# Altium PCB CoaxPress_SFP.PcbDoc
Units mm, origin at the board's own origin, x right, y up, seen from the top; angles counter-clockwise.
Board outline 58 x 11 mm, 4 copper layers (Top Layer, Mid-Layer 1, Mid-Layer 2, Bottom Layer); 27 components, 25 nets, 129 pads, 0 vias.
Unrouted connection lines stored in the file: 76.
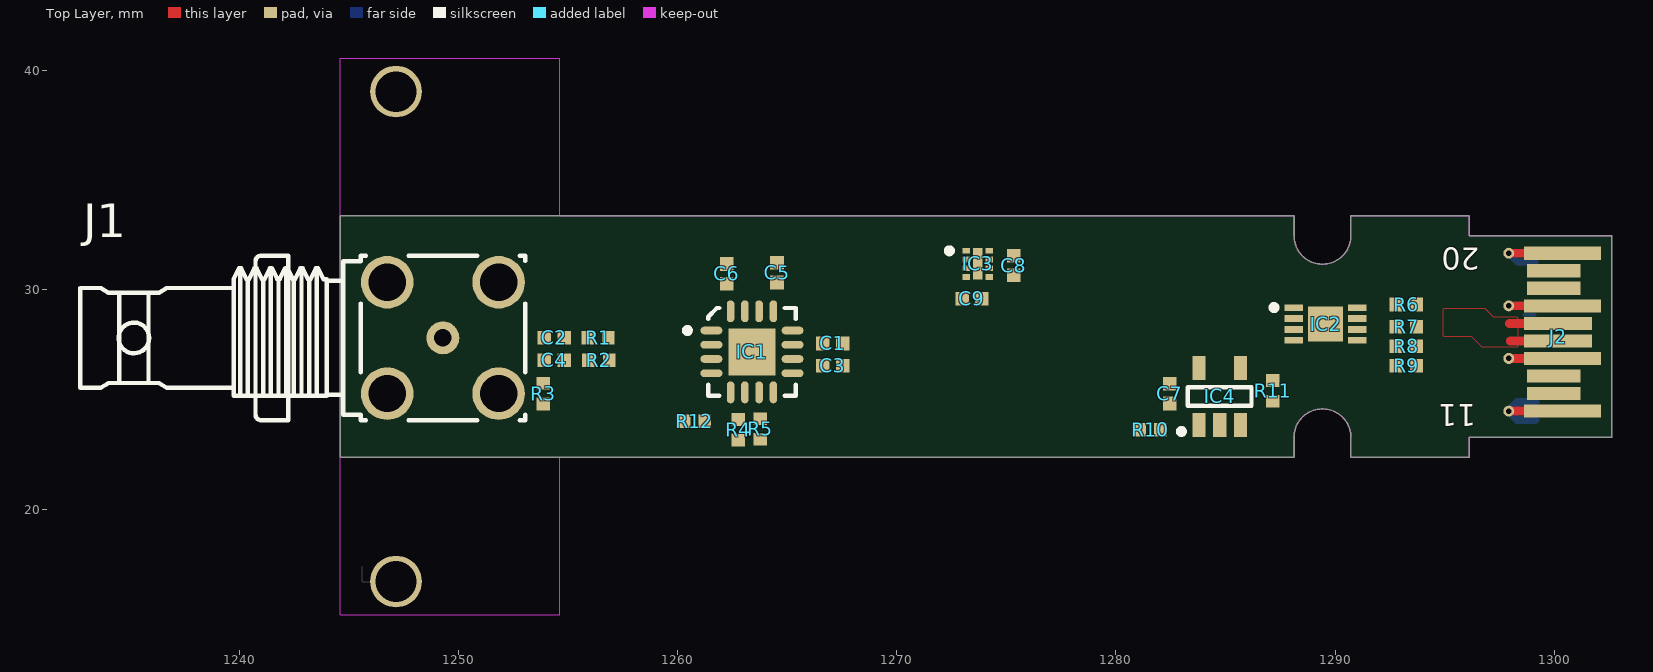
[diagram p0: Top Layer view]
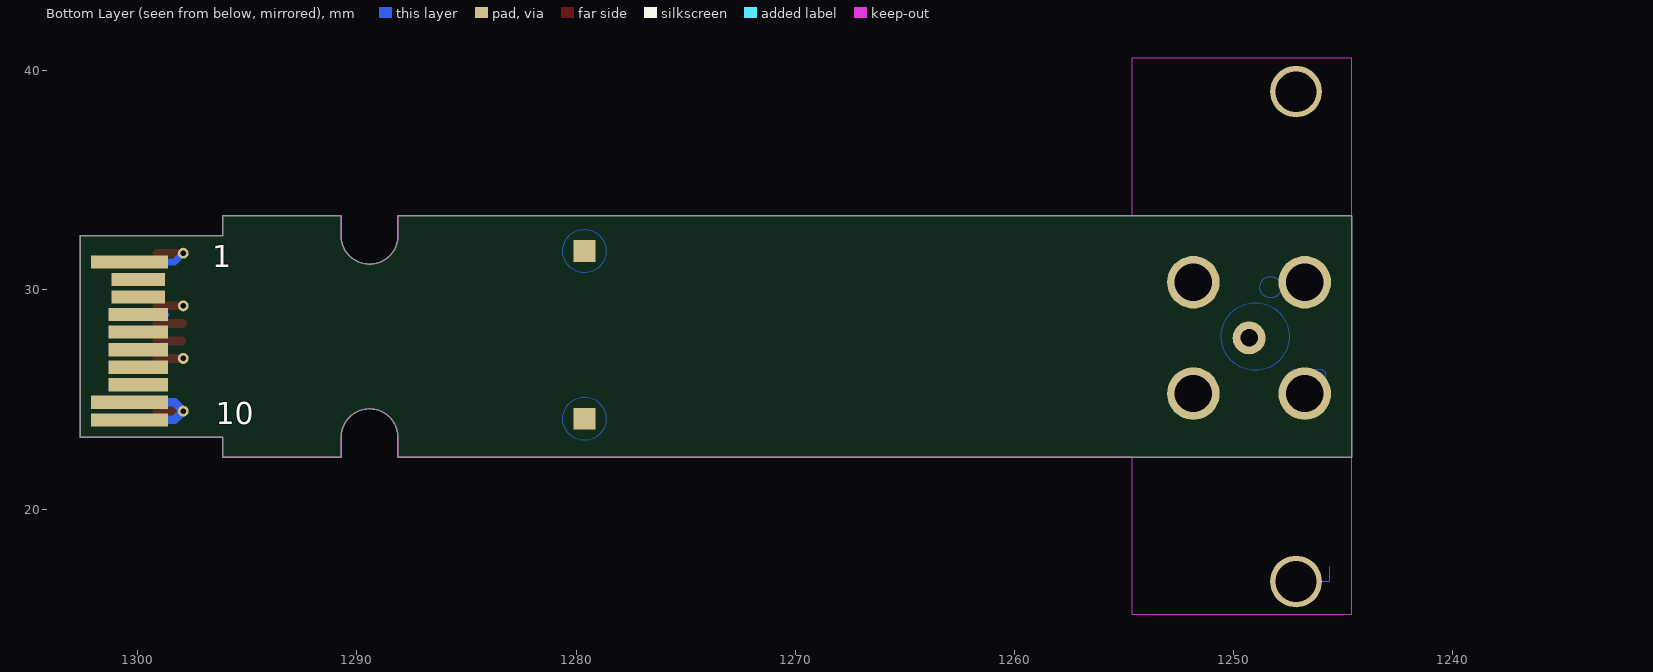
[diagram p1: Bottom Layer view, seen from below]
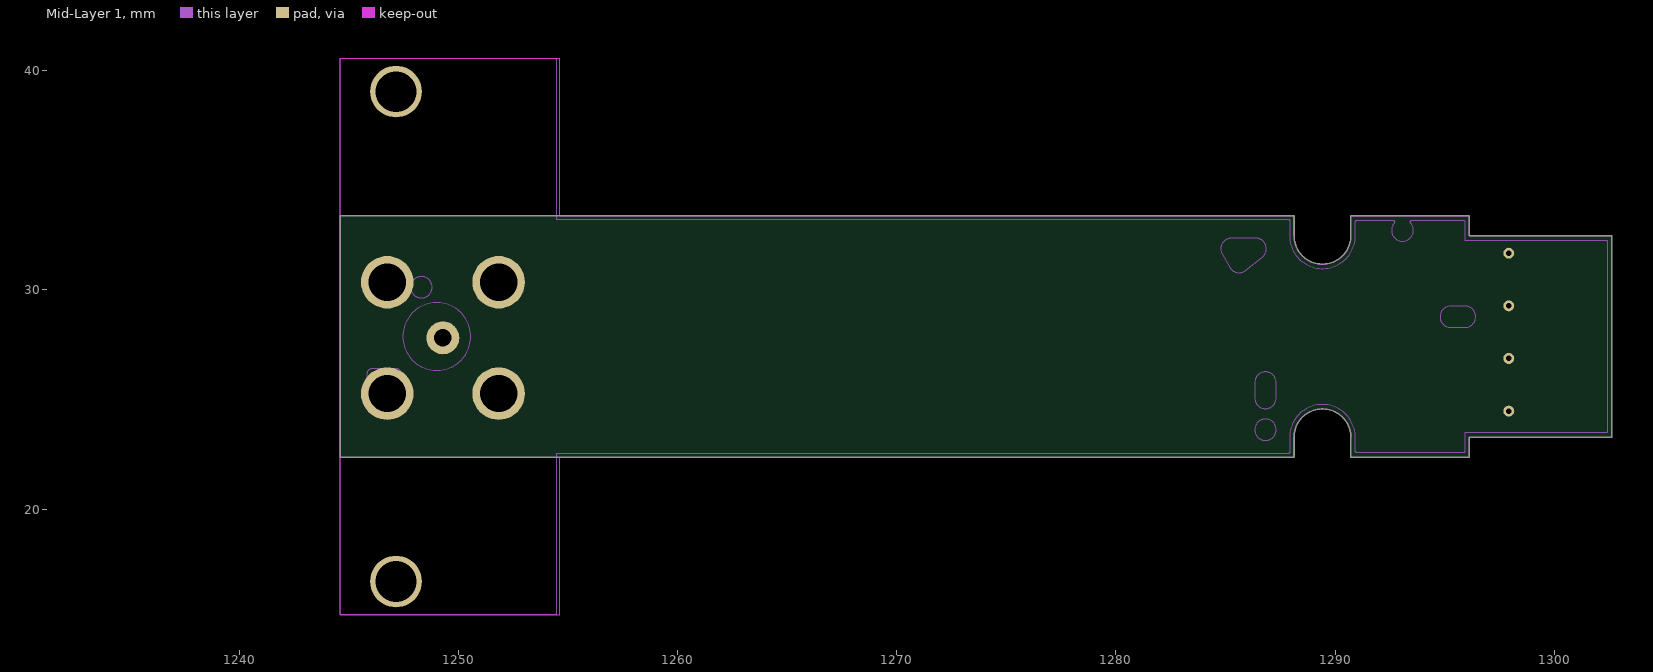
[diagram p2: Mid-Layer 1]
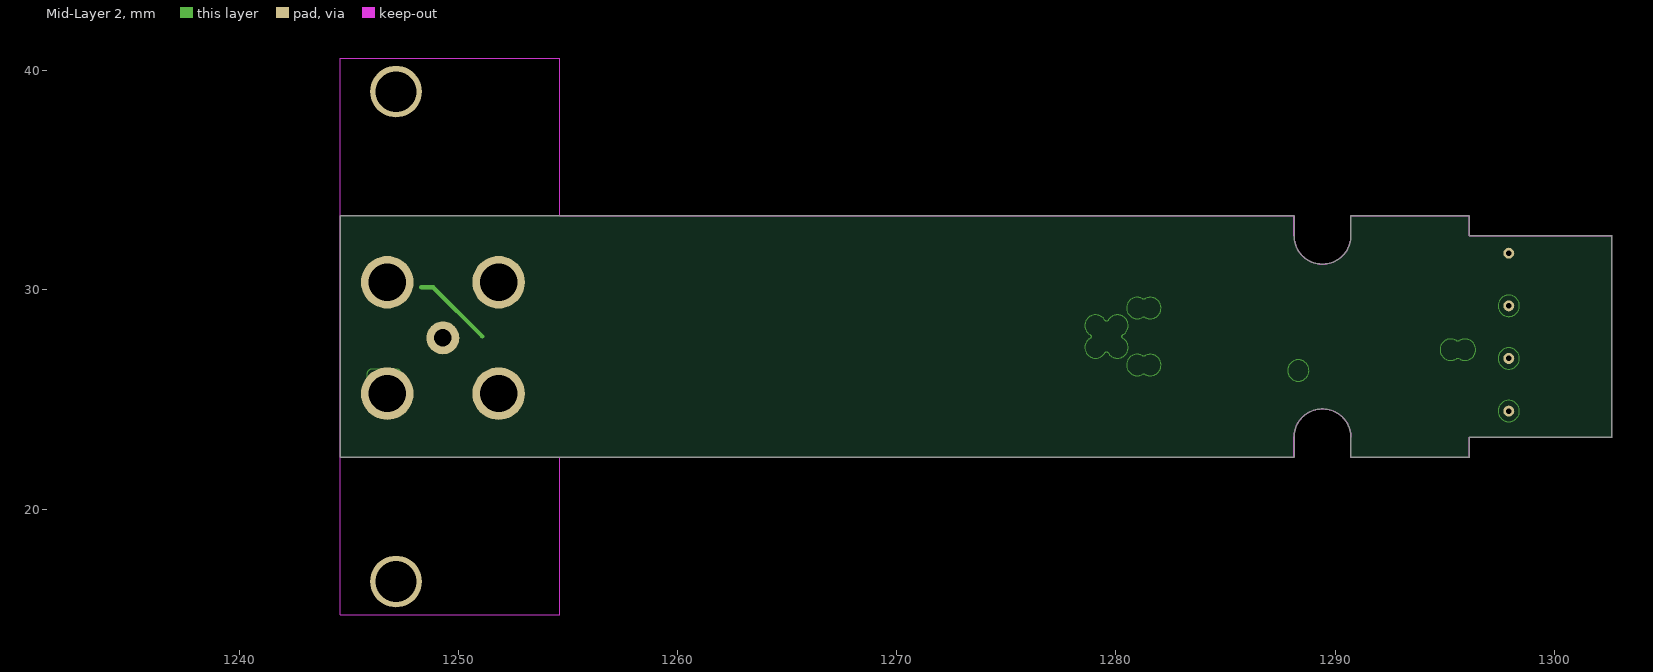
[diagram p3: Mid-Layer 2]

## Layer stack, top to bottom
Top Solder: solder mask 0.0102, Solder Resist, Dk 3.5
Top Layer: signal copper 0.0356
Dielectric 1: dielectric 0.32, FR-4, Dk 4.8
Mid-Layer 1: signal copper 0.0356
Dielectric 2: dielectric 0.32, FR-4, Dk 4.8
Mid-Layer 2: signal copper 0.0356
Dielectric 3: dielectric 0.32, FR-4, Dk 4.8
Bottom Layer: signal copper 0.0356
Bottom Solder: solder mask 0.0102, Solder Resist, Dk 3.5

## Board outline
1244.622,22.374 1288.118,22.374 1288.12,22.376 1288.12,23.276 1288.124,23.367 1288.133,23.457 1288.149,23.546 1288.171,23.634 1288.199,23.72 1288.233,23.804 1288.272,23.885 1288.318,23.964 1288.368,24.039 1288.424,24.11 1288.485,24.178 1288.55,24.241 1288.619,24.299 1288.692,24.352 1288.769,24.4 1288.849,24.443 1288.932,24.479 1289.017,24.51 1289.104,24.535 1289.193,24.554 1289.282,24.567 1289.373,24.573 1289.463,24.573 1289.554,24.567 1289.643,24.554 1289.732,24.535 1289.819,24.51 1289.904,24.479 1289.987,24.443 1290.067,24.4 1290.143,24.352 1290.217,24.299 1290.286,24.241 1290.351,24.178 1290.412,24.11 1290.468,24.039 1290.518,23.964 1290.564,23.886 1290.603,23.804 1290.637,23.72 1290.665,23.634 1290.687,23.546 1290.703,23.457 1290.712,23.367 1290.715,23.276 1290.715,22.376 1290.718,22.374 1296.118,22.374 1296.12,22.376 1296.12,23.274 1302.618,23.274 1302.62,23.276 1302.62,32.476 1302.618,32.479 1296.12,32.479 1296.12,33.376 1296.118,33.379 1290.718,33.379 1290.715,33.376 1290.716,32.476 1290.712,32.386 1290.703,32.296 1290.687,32.207 1290.665,32.119 1290.637,32.033 1290.603,31.949 1290.564,31.867 1290.518,31.789 1290.468,31.714 1290.412,31.642 1290.351,31.575 1290.286,31.512 1290.217,31.454 1290.144,31.401 1290.067,31.353 1289.987,31.31 1289.904,31.273 1289.819,31.242 1289.732,31.217 1289.643,31.199 1289.554,31.186 1289.463,31.18 1289.373,31.18 1289.282,31.186 1289.193,31.199 1289.104,31.217 1289.017,31.242 1288.932,31.273 1288.849,31.31 1288.769,31.353 1288.693,31.401 1288.619,31.454 1288.55,31.512 1288.485,31.575 1288.424,31.642 1288.368,31.714 1288.318,31.789 1288.272,31.867 1288.233,31.949 1288.199,32.033 1288.171,32.119 1288.149,32.207 1288.133,32.296 1288.124,32.386 1288.12,32.476 1288.12,33.376 1288.118,33.379 1244.622,33.379

## Design rules (kind name [scope] priority, off if disabled: settings)
Clearance [All] p1: gap=0.254 ignorepadtopadclearanceinfootprint=FALSE
PolygonConnect CAM_PolygonConnect_$Net31 [InNet('$Net31')] p1: connectstyle=Direct reliefconductorwidth=0.254 reliefentries=4 polygonreliefangle="90 Angle" airgapwidth=0.254
PolygonConnect CAM_PolygonConnect_$Net33 [InNet('$Net33')] p2: connectstyle=Direct reliefconductorwidth=0.254 reliefentries=4 polygonreliefangle="90 Angle" airgapwidth=0.254
PolygonConnect CAM_PolygonConnect_$Net32 [InNet('$Net32')] p3: connectstyle=Direct reliefconductorwidth=0.254 reliefentries=4 polygonreliefangle="90 Angle" airgapwidth=0.254
PolygonConnect CAM_PolygonConnect_$Net39 [InNet('$Net39')] p4: connectstyle=Direct reliefconductorwidth=0.254 reliefentries=4 polygonreliefangle="90 Angle" airgapwidth=0.254
PolygonConnect CAM_PolygonConnect_$Net0 [InNet('$Net0')] p5: connectstyle=Direct reliefconductorwidth=0.254 reliefentries=4 polygonreliefangle="90 Angle" airgapwidth=0.254
PolygonConnect CAM_PolygonConnect_$Net5 [InNet('$Net5')] p6: connectstyle=Direct reliefconductorwidth=0.254 reliefentries=4 polygonreliefangle="90 Angle" airgapwidth=0.254
PolygonConnect CAM_PolygonConnect_$Net6 [InNet('$Net6')] p7: connectstyle=Direct reliefconductorwidth=0.254 reliefentries=4 polygonreliefangle="90 Angle" airgapwidth=0.254
PolygonConnect CAM_PolygonConnect_$Net7 [InNet('$Net7')] p8: connectstyle=Direct reliefconductorwidth=0.254 reliefentries=4 polygonreliefangle="90 Angle" airgapwidth=0.254
PolygonConnect CAM_PolygonConnect_$Net8 [InNet('$Net8')] p9: connectstyle=Direct reliefconductorwidth=0.254 reliefentries=4 polygonreliefangle="90 Angle" airgapwidth=0.254
PolygonConnect CAM_PolygonConnect_$Net26 [InNet('$Net26')] p10: connectstyle=Direct reliefconductorwidth=0.254 reliefentries=4 polygonreliefangle="90 Angle" airgapwidth=0.254
PolygonConnect CAM_PolygonConnect_$Net27 [InNet('$Net27')] p11: connectstyle=Direct reliefconductorwidth=0.254 reliefentries=4 polygonreliefangle="90 Angle" airgapwidth=0.254
PolygonConnect CAM_PolygonConnect_$Net20 [InNet('$Net20')] p12: connectstyle=Direct reliefconductorwidth=0.254 reliefentries=4 polygonreliefangle="90 Angle" airgapwidth=0.254
PolygonConnect CAM_PolygonConnect_$Net19 [InNet('$Net19')] p13: connectstyle=Direct reliefconductorwidth=0.254 reliefentries=4 polygonreliefangle="90 Angle" airgapwidth=0.254
PolygonConnect CAM_PolygonConnect_$Net18 [InNet('$Net18')] p14: connectstyle=Direct reliefconductorwidth=0.254 reliefentries=4 polygonreliefangle="90 Angle" airgapwidth=0.254
PolygonConnect CAM_PolygonConnect_$Net17 [InNet('$Net17')] p15: connectstyle=Direct reliefconductorwidth=0.254 reliefentries=4 polygonreliefangle="90 Angle" airgapwidth=0.254
PolygonConnect CAM_PolygonConnect_$Net25 [InNet('$Net25')] p16: connectstyle=Direct reliefconductorwidth=0.254 reliefentries=4 polygonreliefangle="90 Angle" airgapwidth=0.254
PolygonConnect CAM_PolygonConnect_$Net21 [InNet('$Net21')] p17: connectstyle=Direct reliefconductorwidth=0.254 reliefentries=4 polygonreliefangle="90 Angle" airgapwidth=0.254
PolygonConnect CAM_PolygonConnect_$Net22 [InNet('$Net22')] p18: connectstyle=Direct reliefconductorwidth=0.254 reliefentries=4 polygonreliefangle="90 Angle" airgapwidth=0.254
PolygonConnect [All] p19: connectstyle=Relief reliefconductorwidth=0.254 reliefentries=4 polygonreliefangle="90 Angle" airgapwidth=0.254
RoutingVias [All] p1: holewidth=0.711 width=1.27 viastyle="Through Hole" minholewidth=0.711 minwidth=1.27 maxholewidth=0.711 maxwidth=1.27
SolderMaskExpansion [All] p1: expansion=0.102 istentingtop=FALSE
SupplyNets "Schematic Supply Nets_2" [InNet('P1V2')] p1: voltage=0.000
SupplyNets "Schematic Supply Nets_1" [InNet('P3V3')] p2: voltage=0.000
SupplyNets "Schematic Supply Nets" [InNet('GND')] p3: voltage=0.000
Width CAM_PolygonWidth_$Net33 [InPolygon And InNet('$Net33')] p1: maxlimit=0.254 minlimit=0.025 preferedwidth=0.254 toplayer_minwidth=0.254 midlayer1_minwidth=0.254 midlayer2_minwidth=0.254 bottomlayer_maxwidth=0.025 bottomlayer_prefwidth=0.025 minimp=50.000000 maximp=50.000000 favimp=50.000000
Width CAM_PolygonWidth_$Net0 [InPolygon And InNet('$Net0')] p2: maxlimit=0.254 minlimit=0.025 preferedwidth=0.254 toplayer_maxwidth=0.025 toplayer_prefwidth=0.025 midlayer1_minwidth=0.254 midlayer2_minwidth=0.254 bottomlayer_minwidth=0.254 minimp=50.000000 maximp=50.000000 favimp=50.000000
Width CAM_PolygonWidth_$Net5 [InPolygon And InNet('$Net5')] p3: maxlimit=0.254 minlimit=0.025 preferedwidth=0.254 toplayer_maxwidth=0.025 toplayer_prefwidth=0.025 midlayer1_minwidth=0.254 midlayer2_minwidth=0.254 bottomlayer_minwidth=0.254 minimp=50.000000 maximp=50.000000 favimp=50.000000
Width [All] p4: maxlimit=0.254 minlimit=0.254 preferedwidth=0.254
30 further rules are at their usual default settings.

## Components (designator, comment, footprint, x,y, rotation, side; value= is the part's Value field where it differs from the comment)
C1 "100nF" CAPC1005X55N 1267.079,27.559 r0 top
C2 "100nF" CAPC1005X55N 1254.379,27.813 r0 top
C3 "100nF" CAPC1005X55N 1267.079,26.543 r0 top
C4 "100nF" CAPC1005X55N 1254.379,26.797 r0 top
C5 "100nF" CAPC1005X55N 1264.539,30.792 r270 top
C6 "100nF" CAPC1005X55N 1262.253,30.734 r270 top
C7 "100nF" CAPC1005X55N 1282.446,25.273 r90 top
C8 "1uF" CAPC1005X55N 1275.334,31.115 r90 top
C9 "1uF" CAPC1005X55N 1273.429,29.591 r180 top
IC1 "EQCO62R20.3" QFN65P400X400X95-17N-S215 1263.396,27.178 r0 top
IC2 "M24C02-RMC6TP" SON50P300X200X60-9N-S160 1289.558,28.448 r0 top
IC3 "NCP186AMX120TAG" "ONSEMI_CASE 711AS" 1273.7,31.188 r0 top
IC4 "ADCMP600BRJZ-R2" SOT95P280X145-5N 1284.732,25.146 r90 top
J1 "HD-BNC" AMPHENOL_34-1030-12G 1249.299,27.813 r0 top
J2 "SFP" SFP_PCB_EDGE 1302.493,27.876 r90 top
R1 "15" RESC1005X40N 1256.373,27.813 r0 top
R2 "15" RESC1005X40N 1256.411,26.797 r0 top
R3 "75" RESC1005X40N 1253.871,25.273 r90 top
R4 "1k2" RESC1005X40N 1262.761,23.622 r90 top
R5 "10k" RESC1005X40N 1263.777,23.66 r90 top
R6 "15" RESC1005X40N 1293.241,29.337 r180 top
R7 "10k" RESC1005X40N 1293.241,28.321 r180 top
R8 "15" RESC1005X40N 1293.241,27.432 r180 top
R9 "15" RESC1005X40N 1293.241,26.543 r180 top
R10 "220" RESC1005X40N 1281.557,23.622 r0 top
R11 "100" RESC1005X40N 1287.145,25.4 r270 top
R12 "100" RESC1005X40N 1260.767,24.003 r0 top

## Footprints (in the part's own frame and the unit in brackets; to place one, negate y for a bottom-side part, rotate by r counter-clockwise, add the part's x,y. Pads: shape width x height; smd on the part's side, far side on the other; paste and mask are expansions set on the pad)
AMPHENOL_34-1030-12G [mm] "75 Ohm HD-BNC Through Hole Right Angle PCB Jack"
  round 1.5 hole 0.8: 1(0,0)
  round 2.4 hole 1.7: 2(-2.54,-2.54) 2(-2.54,2.54) 2(2.54,-2.54) 2(2.54,2.54)
  silkscreen extent -16.55,-3.75 3.75,3.75, body extent -16.55,-3.75 3.75,3.75, height 8
CAPC1005X55N [mm] "Capacitor, Non-Polarized, Chip; 1.00mm L X 0.50mm W X 0.70mm H, IPC Medium Density"
  rect 0.62x0.62 smd: 1(-0.45,0) 2(0.45,0)
  body extent -0.52,-0.27 0.53,0.28, height 0.55
"ONSEMI_CASE 711AS" [mm] "PSON, 0.50mm Pitch; 10 Pin, 3.00mm X 3.00mm X 0.80mm H body (w/Thermal Tab 1.3 X 2.1mm), IPC Medium Density"
  rect 0.35x0.26 smd: 1(-0.525,0.6) 2(-0.525,0.2) 3(-0.525,-0.2) 4(-0.525,-0.6) 5(0.525,-0.6) 6(0.525,-0.2) 7(0.525,0.2) 8(0.525,0.6)
  rect 0.44x1.44 smd: 9(0,0)
  silkscreen extent -1.42,0.48 -1.17,0.72, body extent -0.6,-0.8 0.6,0.8, height 0.45
QFN65P400X400X95-17N-S215 [mm] "QFN, 0.65mm Pitch, Square; 16 Pin, 4.00mm L X 4.00mm W X 0.95mm H Body (w/Thermal tab 2.15 X 2.15mm), IPC Medium Density"
  oval 1x0.35 smd: 1(-1.85,0.975) 2(-1.85,0.325) 3(-1.85,-0.325) 4(-1.85,-0.975) 9(1.85,-0.975) 10(1.85,-0.325) 11(1.85,0.325) 12(1.85,0.975)
  oval 0.35x1 smd: 5(-0.975,-1.85) 6(-0.325,-1.85) 7(0.325,-1.85) 8(0.975,-1.85) 13(0.975,1.85) 14(0.325,1.85) 15(-0.325,1.85) 16(-0.975,1.85)
  rect 2.15x2.15 smd: 17(0,0)
  silkscreen extent -3.07,-2 2,2, body extent -2,-2 2,2, height 0.95
RESC1005X40N [mm] "Chip Resistor, EIA 0402, Metric 1005, Body 1.0x0.5mm, IPC Medium Density"
  rect 0.58x0.62 smd: 1(-0.47,0) 2(0.47,0)
  body extent -0.52,-0.27 0.53,0.28, height 0.4
SFP_PCB_EDGE [mm] "20 Contacts SFP  Board Eddge Connector"
  rect 0.6x3.25 smd far side paste-0.3: 1(3.4,2.125) 9(-3,2.125) 10(-3.8,2.125)
  rect 0.6x2.45 smd far side paste-0.3: 2(2.6,2.525) 3(1.8,2.525) 4(1,2.525) 5(0.2,2.525) 6(-0.6,2.525) 7(-1.4,2.525) 8(-2.2,2.525)
  rect 0.6x3.25 smd paste-0.3: 11(-3.4,2.125) 14(-1,2.125) 17(1.4,2.125) 20(3.8,2.125)
  rect 0.6x2.45 smd paste-0.3: 12(-2.6,2.525) 13(-1.8,2.525) 18(2.2,2.525) 19(3,2.525)
  rect 0.6x2.85 smd paste-0.3: 15(-0.2,2.325) 16(0.6,2.325)
SON50P300X200X60-9N-S160 [mm] "SON (DFN), 0.50mm pitch, 8 pin, 2mm X 3mm X 0.8mm H body (w/thermal tab 1.60 X 1.60mm),  IPC Medium Density"
  rect 0.85x0.3 smd: 1(-1.45,0.75) 2(-1.45,0.25) 3(-1.45,-0.25) 4(-1.45,-0.75) 5(1.45,-0.75) 6(1.45,-0.25) 7(1.45,0.25) 8(1.45,0.75)
  rect 1.6x1.6 smd: 9(0,0)
  silkscreen extent -2.47,0.63 -2.22,0.87, body extent -1.5,-1 1.5,1, height 0.62
SOT95P280X145-5N [mm] "SOT, 0.95mm pitch; 5 pin, 1.60mm W X 2.90mm L X 1.45mm H body, IPC Medium Density"
  rect 1.1x0.6 smd: 1(-1.3,0.95) 2(-1.3,0) 3(-1.3,-0.95) 4(1.3,-0.95) 5(1.3,0.95)
  silkscreen extent -1.72,-1.45 0.43,1.87, body extent -1.4,-1.5 1.4,1.5, height 1.45

## Part data
C1 C2 C3 C4 C5 C6 C7: library part CC0402_100NF_16V_10%_X5R, "Non-polarised capacitor", Case=0402, Manufacturer=GENERIC, Manufacturer1 ComponentHeight=0.55mm, Manufacturer1 Example=MURATA, Manufacturer1 Part Number=GRM155R61C104KA88D, Tolerance=±10%, Voltage=16V, Author="CERN DEM JLC", Component Type=Standard, CreateDate=10.12.2013, HelpURL=\\cern.ch\dfs\Applications\Altium\Datasheets\CC0402_X5R_MURATA_GRM.pdf, LatestRevisionDate=10.12.2013, Manufacturer Part Number=CC0402_100NF_16V_10%_X5R, Mounted=Yes, Part Description="SMD Multilayer Chip Ceramic Capacitor", Part Number=CC0402_100NF_16V_10%_X5R, Pin Count=2, Sense=No, SMD=Yes, Socket=No, Status=None, TC=X5R
C8 C9: library part CC0402_1UF_16V_10%_X5R, "Non-polarised capacitor", Case=0402, Manufacturer=GENERIC, Manufacturer1 ComponentHeight=0.55mm, Manufacturer1 Example=TDK, Manufacturer1 Part Number=C1005X5R1C105KT, Tolerance=±10%, Voltage=16V, Author="CERN DEM JLC", Component Type=Standard, CreateDate=25.10.2012, HelpURL=\\cern.ch\dfs\Applications\Altium\Datasheets\CC0402_X5R_TDK_C.pdf, LatestRevisionDate=25.10.2012, Manufacturer Part Number=CC0402_1UF_16V_10%_X5R, Mounted=Yes, Part Description="SMD Multilayer Chip Ceramic Capacitor", Part Number=CC0402_1UF_16V_10%_X5R, Pin Count=2, Sense=No, SMD=Yes, Socket=No, Status=Preferred, TC=X5R
IC1: "6.25Gbps Asymmetric Coax Equalizer", Case=QFN16, Manufacturer="MICROCHIP TECHNOLOGY", Author="CERN DEM JLC", Bonding=No, Component Type=Standard, ComponentHeight=0.95mm, CreateDate=11.07.2018, Device=EQCO62R20.3, HelpURL=\\cern.ch\dfs\Applications\Altium\Datasheets\EQCO62R20.3.pdf, LatestRevisionDate=11.07.2018, Manufacturer Part Number=EQCO62R20.3, Mounted=Yes, PackageDescription="QFN, 0.65mm Pitch, Square; 16 Pin, 4.00mm L X 4.00mm W X 0.95mm H body (w/Thermal Tab 2.15 X 2.15mm), IPC Medium Density", Part Description="6.25Gbps Asymmetric Coax Equalizer", Part Number=EQCO62R20.3, Pin Count=17, PressFit=No, Sense=No, SMD=Yes, Socket=No
IC2: "2-Kbit (256 x 8bit) Serial I2C Bus EEPROM", Case=SON8, Manufacturer="ST MICROELECTRONICS", Author="CERN DEM MR", Bonding=No, Component Type=Standard, ComponentHeight=0.6mm, CreateDate=12.12.2019, Device=M24C02-RMC6TP, HelpURL=\\cern.ch\dfs\Applications\Altium\Datasheets\M24C02-RMC6TP.pdf, LatestRevisionDate=12.12.2019, Manufacturer Part Number=M24C02-RMC6TP, Mounted=Yes, PackageDescription="SON (DFN), 0.50mm pitch, 8 pin, 2mm X 3mm X 0.8mm H body (w/thermal tab 1.60 X 1.60mm),  IPC Medium Density", Part Description="2-Kbit (256 x 8bit) Serial I2C Bus EEPROM", Part Number=M24C02-RMC6TP, Pin Count=9, PressFit=No, Sense=No, SMD=Yes, Socket=No
IC3: "1A, LDO Regulator - Fast Transient Response Low Voltage", Case=SON8, Manufacturer="ON SEMICONDUCTOR", Manufacturer Part Number=NCP186AMX120TA, Author="CERN DEM BC", Bonding=No, Component Type=Standard, ComponentHeight=0.45mm, CreateDate=23.03.2020, Device=NCP186AMX120TAG, HelpURL=\\cern.ch\dfs\Applications\Altium\Datasheets\NCP186AMX120TAG.pdf, LatestRevisionDate=24.05.2022, Mounted=Yes, PackageDescription="PSON, ONSEMI Case 711AS, 0.40mm Pitch, 8 Pin, 1.20mm W X 1.60mm L X 0.45mm H body (w/Pullback Leads, Thermal Tab 0.30 X 1.30mm)", Part Description="1.2V, 1A, LDO Regulator - Fast Transient Response Low Voltage", Part Number=NCP186AMX120TAG, Pin Count=9, PressFit=No, Sense=No, SMD=Yes, Socket=No
IC4: "Rail-to-Rail, Very Fast, 2.5 V to 5.5 V Single-Supply TTL/CMOS Comparator", Case=SOT23-5, Manufacturer="ANALOG DEVICES", Manufacturer Part Number=ADCMP600BRJ, Author="CERN DEM JLC", Bonding=No, Component Type=Standard, ComponentHeight=1.45mm, CreateDate=25.04.2012, Device=ADCMP600BRJZ-R2, HelpURL=\\cern.ch\dfs\Applications\Altium\Datasheets\ADCMP600BRJZ-R2.pdf, LatestRevisionDate=31.03.2022, Mounted=Yes, PackageDescription="SOT, 0.95mm Pitch; 5 Pin, 1.60mm W X 2.90mm L X 1.45mm H body, IPC Medium Density", Part Description="Rail-to-Rail, Very Fast, 2.5 V to 5.5 V Single-Supply TTL/CMOS Comparator", Part Number=ADCMP600BRJZ-R2, Pin Count=5, PressFit=No, Sense=No, SMD=Yes, Socket=No
J1: library part AMPHENOL_34-1030-12G, Manufacturer=AMPHENOL-RF, Manufacturer Part Number=34-1030-12G, Author="CERN DEM JLC", Component Type=Standard, ComponentHeight=8.5mm, CreateDate=21.02.2017, Family=HD-BNC, HelpURL=\\cern.ch\dfs\Applications\Altium\Datasheets\AMPHENOL_34-1030-12G.pdf, LatestRevisionDate=21.02.2017, Mounted=Yes, Part Description="75 Ohms HD-BNC Right Angle PCB Receptacle (Jack)", Part Number=AMPHENOL_34-1030-12G, Pin Count=2, PressFit=No, Sense=No, SMD=No, Socket=No, Status=None
J2: library part SFP_PCB_EDGE, "20 Position SFP  Connector (Small Form-factor Pluggable)", Author="CERN DEM JLC", Component Type="Standard (No BOM)", ComponentHeight=0mm, CreateDate=05.07.2018, Family=SFP, HelpURL=\\cern.ch\dfs\Applications\Altium\Datasheets\SFP_PCB_EDGE.pdf, LatestRevisionDate=05.07.2018, Mounted=No, Part Description="20 contacts SFP PCB Edge Finger Connector", Part Number=SFP_PCB_EDGE, Pin Count=20, PressFit=No, Sense=No, SMD=No, Socket=No, Status=None
R1 R2 R6 R8 R9: library part R0402_15R_1%_0.0625W_100PPM, "Resistor - 1%", Case=0402, Manufacturer=GENERIC, Manufacturer1 ComponentHeight=0.4mm, Manufacturer1 Example="YAGEO PHYCOMP", Manufacturer1 Part Number=232270671509L, Power=0.0625W, Tolerance=±1%, Author="CERN DEM JLC", Component Type=Standard, CreateDate=03.12.2007, HelpURL=\\cern.ch\dfs\Applications\Altium\Datasheets\R0402_Phycomp_RC0402.pdf, LatestRevisionDate=17.10.2012, Manufacturer Part Number=R0402_15R_1%_0.0625W_100PPM, Mounted=Yes, Part Description="General Purpose Thick Film Chip Resistor", Part Number=R0402_15R_1%_0.0625W_100PPM, Pin Count=2, PressFit=No, Sense=No, SMD=Yes, Socket=No, Status="Not Recommended", TC=±100ppm/°C
R3: library part R0402_75R_1%_0.0625W_100PPM, "Resistor - 1%", Case=0402, Manufacturer=GENERIC, Manufacturer1 ComponentHeight=0.4mm, Manufacturer1 Example="YAGEO PHYCOMP", Manufacturer1 Part Number=232270677509L, Power=0.0625W, Tolerance=±1%, Author="CERN DEM JLC", Component Type=Standard, CreateDate=03.12.2007, HelpURL=\\cern.ch\dfs\Applications\Altium\Datasheets\R0402_Phycomp_RC0402.pdf, LatestRevisionDate=17.10.2012, Manufacturer Part Number=R0402_75R_1%_0.0625W_100PPM, Mounted=Yes, Part Description="General Purpose Thick Film Chip Resistor", Part Number=R0402_75R_1%_0.0625W_100PPM, Pin Count=2, PressFit=No, Sense=No, SMD=Yes, Socket=No, Status="Not Recommended", TC=±100ppm/°C
R4: library part R0402_1K2_1%_0.0625W_100PPM, "Resistor - 1%", Case=0402, Manufacturer=GENERIC, Manufacturer1 ComponentHeight=0.4mm, Manufacturer1 Example="YAGEO PHYCOMP", Manufacturer1 Part Number=232270671202L, Power=0.0625W, Tolerance=±1%, Author="CERN DEM JLC", Component Type=Standard, CreateDate=03.12.2007, HelpURL=\\cern.ch\dfs\Applications\Altium\Datasheets\R0402_Phycomp_RC0402.pdf, LatestRevisionDate=17.10.2012, Manufacturer Part Number=R0402_1K2_1%_0.0625W_100PPM, Mounted=Yes, Part Description="General Purpose Thick Film Chip Resistor", Part Number=R0402_1K2_1%_0.0625W_100PPM, Pin Count=2, PressFit=No, Sense=No, SMD=Yes, Socket=No, Status="Not Recommended", TC=±100ppm/°C
R5 R7: library part R0402_10K_1%_0.0625W_100PPM, "Resistor - 1%", Case=0402, Manufacturer=GENERIC, Manufacturer1 ComponentHeight=0.4mm, Manufacturer1 Example="YAGEO PHYCOMP", Manufacturer1 Part Number=232270671003L, Power=0.0625W, Tolerance=±1%, Author="CERN DEM JLC", Component Type=Standard, CreateDate=03.12.2007, HelpURL=\\cern.ch\dfs\Applications\Altium\Datasheets\R0402_Phycomp_RC0402.pdf, LatestRevisionDate=17.10.2012, Manufacturer Part Number=R0402_10K_1%_0.0625W_100PPM, Mounted=Yes, Part Description="General Purpose Thick Film Chip Resistor", Part Number=R0402_10K_1%_0.0625W_100PPM, Pin Count=2, PressFit=No, Sense=No, SMD=Yes, Socket=No, Status="Not Recommended", TC=±100ppm/°C
R10: library part R0402_220R_1%_0.0625W_100PPM, "Resistor - 1%", Case=0402, Manufacturer=GENERIC, Manufacturer1 ComponentHeight=0.4mm, Manufacturer1 Example="YAGEO PHYCOMP", Manufacturer1 Part Number=232270672201L, Power=0.0625W, Tolerance=±1%, Author="CERN DEM JLC", Component Type=Standard, CreateDate=03.12.2007, HelpURL=\\cern.ch\dfs\Applications\Altium\Datasheets\R0402_Phycomp_RC0402.pdf, LatestRevisionDate=17.10.2012, Manufacturer Part Number=R0402_220R_1%_0.0625W_100PPM, Mounted=Yes, Part Description="General Purpose Thick Film Chip Resistor", Part Number=R0402_220R_1%_0.0625W_100PPM, Pin Count=2, PressFit=No, Sense=No, SMD=Yes, Socket=No, Status="Not Recommended", TC=±100ppm/°C
R11 R12: library part R0402_100R_1%_0.1W_100PPM, "Resistor - 1%", Case=0402, Manufacturer=GENERIC, Manufacturer1 ComponentHeight=0.4mm, Manufacturer1 Example=PANASONIC, Manufacturer1 Part Number=ERJ2RKF1000X, Manufacturer Part Number=R0402_100R_1%_0.1W_100PPM_50V, Power=0.1W, Tolerance=±1%, Voltage=50V, Author="CERN DEM JLC", Component Type=Standard, CreateDate=12.12.2013, HelpURL=\\cern.ch\dfs\Applications\Altium\Datasheets\R0402_PANASONIC_ERJ2RK.pdf, LatestRevisionDate=03.03.2015, Mounted=Yes, Part Description="General Purpose Thick Film Chip Resistor", Part Number=R0402_100R_1%_0.1W_100PPM, Pin Count=2, PressFit=No, Sense=No, SMD=Yes, Socket=No, Status="Not Recommended", TC=±100ppm/°C

## Free pads (board coordinates)
  round 2.35 hole 1.85: 1(1247.158,16.701) 1(1247.158,39.051)
  rect 1x1 smd far side paste-0.5 mask+0.5: 1(1279.618,24.126) 1(1279.618,31.776)
  round 0.5 hole 0.25 mask+0.614: 1(1297.918,24.476) 1(1297.918,26.876) 1(1297.918,29.276) 1(1297.918,31.676)
  rect 2.7x0.6 smd far side paste-1.35 mask-0.486: 1(1299.968,25.676) 1(1299.968,26.476) 1(1299.968,27.276) 1(1299.968,28.076) 1(1299.968,28.876)
  rect 3.1x0.6 smd paste-1.55: 1(1300.168,27.676) 1(1300.168,28.476)
  rect 3.5x0.6 smd far side paste-1.75: 1(1300.368,24.076) 1(1300.368,24.876) 1(1300.368,31.276)
  rect 3.5x0.6 smd paste-1.75: 1(1300.368,24.476) 1(1300.368,26.876) 1(1300.368,29.276) 1(1300.368,31.676)

## Nets (pads, with @x,y where several pads share a name; then routed paths per layer and width w, separated by ;. In a path a pad name is that pad's centre, name@x,y a point inside that pad or via, vN(x,y) a via of type N, cw(c..) or ccw(c..) an arc to the next point about the centre after c; other vN are vias at no path point)
GND: C5.1 C6.1 C7.1 C8.1 C9.1 IC1.1 IC1.4 IC1.9 IC1.12 IC1.17 IC2.1 IC2.2 IC2.3 IC2.4 IC2.7 IC2.9 IC3.5 IC3.9 IC4.2 J1.2 J2.1 J2.17 J2.20 R3.1 R4.1 R5.1 R6.2 R8.2 R9.2 R12.1 | length 11
  Top Layer w0.4: 1297.918,29.276 J2.17@1299.118,29.276 ; 1297.918,31.676 J2.20@1299.118,31.676
  Mid-Layer 1 w0.05: J1.2@1246.338,25.884 1246.338,25.929 1246.384,26.02 1246.429,26.066 1246.52,26.126 1246.702,26.126 1246.793,26.066 1246.838,26.02 1246.884,25.929 1246.884,25.839 1246.838,25.748 1246.748,25.596 1246.293,25.126 J1.2@1246.929,25.126
  Mid-Layer 2 w0.05: J1.2@1246.293,25.308 1246.338,25.217 1246.384,25.172 1246.52,25.126 1246.657,25.126 1246.793,25.172 1246.884,25.263 1246.929,25.399 1246.929,25.505 1246.884,25.642 1246.838,25.687 1246.748,25.732 1246.611,25.732 1246.884,26.111 J1.2@1246.384,26.111
  Bottom Layer w0.05: J1.2@1246.307,25.46 1246.943,25.46 1246.519,26.111 J1.2@1246.519,25.126
  Bottom Layer w0.3: 1297.918,31.676 1298.318,31.276 J2.1@1299.118,31.276
NetC1_1: C1.1 IC1.11
NetC1_2: C1.2 J2.18
NetC2_1: C2.1 J1.1
NetC2_2: C2.2 R1.1
NetC3_1: C3.1 IC1.10
NetC3_2: C3.2 J2.19
NetC4_1: C4.1 R3.2
NetC4_2: C4.2 R2.1
NetIC1_2: IC1.2 R1.2
NetIC1_3: IC1.3 R2.2
NetIC1_5: IC1.5 R10.1 R12.2
NetIC1_6: IC1.6 R4.2
NetIC1_7: IC1.7 R5.2
NetIC4_1: IC4.1 R10.2
NetIC4_3: IC4.3 J2.13 R11.2
NetIC4_4: IC4.4 J2.12 R11.1
NetJ2_2: J2.2 R6.1
NetJ2_3: J2.3 R7.1
NetJ2_6: J2.6 R8.1
NetJ2_8: J2.8 R9.1
P1V2: C5.2 C6.2 C9.2 IC1.13 IC1.16 IC3.1 IC3.2 IC3.4
P3V3: C7.2 C8.2 IC2.8 IC3.6 IC3.7 IC3.8 IC4.5 J2.9 J2.10 J2.11 J2.14 J2.15 J2.16 R7.2 | length 7.4
  Top Layer w0.4: 1297.918,24.476 J2.11@1299.118,24.476 ; 1297.918,26.876 J2.14@1299.118,26.876 ; 1297.943,28.476 J2.16@1299.118,28.476 ; 1297.988,27.676 J2.15@1299.118,27.676
  Bottom Layer w0.4: J2.10@1299.118,24.076 1298.318,24.076 1297.918,24.476 1298.318,24.876 J2.9@1299.118,24.876
SCL: IC2.6 J2.5
SDA: IC2.5 J2.4 | length 0.5
  Bottom Layer w0.15: 1298.618,28.876 J2.4@1299.118,28.876
pads on no net: IC1.8 IC1.14 IC1.15 IC3.3 J2.7
copper on no net: | length 5.9
  Mid-Layer 2 w0.2: 1248.318,30.126 1248.851,30.126 1251.101,27.876
  Bottom Layer w0: 1245.61,17.369 1245.61,16.701 1247.158,16.701

## Polygon pours and split planes (outlines as drawn)
no net on Mid-Layer 1 "Mid-Layer 1-No Net" (solid, pour order 27): 563 vertices, not listed, extent 1244.618,15.176 1302.418,40.576
no net on Mid-Layer 1 "Mid-Layer 1-No Net 1" (none, pour order 34): 97 vertices, not listed, extent 1245.829,24.845 1247.407,26.407
no net on Mid-Layer 1 "Mid-Layer 1-No Net 2" (none, pour order 32): 91 vertices, not listed, extent 1247.471,26.33 1250.565,29.423
no net on Mid-Layer 1 "Mid-Layer 1-No Net 3" (none, pour order 28): 115 vertices, not listed, extent 1294.781,28.289 1296.405,29.264
no net on Mid-Layer 1 "Mid-Layer 1-No Net 4" (none, pour order 33): 91 vertices, not listed, extent 1247.831,29.639 1248.805,30.613
no net on Mid-Layer 1 "Mid-Layer 1-No Net 5" (none, pour order 31): 126 vertices, not listed, extent 1284.781,30.789 1286.855,32.364
no net on Mid-Layer 1 "Mid-Layer 1-No Net 6" (none, pour order 30): 137 vertices, not listed, extent 1286.331,24.589 1287.305,26.263
no net on Mid-Layer 1 "Mid-Layer 1-No Net 7" (none, pour order 29): 91 vertices, not listed, extent 1286.331,23.139 1287.305,24.113
no net on Mid-Layer 2 "Mid-Layer 2-No Net" (none, pour order 38): 91 vertices, not listed, extent 1297.431,28.789 1298.405,29.763
no net on Mid-Layer 2 "Mid-Layer 2-No Net 1" (none, pour order 37): 91 vertices, not listed, extent 1297.431,26.389 1298.405,27.363
no net on Mid-Layer 2 "Mid-Layer 2-No Net 2" (none, pour order 36): 91 vertices, not listed, extent 1297.431,23.989 1298.405,24.963
no net on Mid-Layer 2 "Mid-Layer 2-No Net 3" (none, pour order 45): 97 vertices, not listed, extent 1245.829,24.845 1247.407,26.392
no net on Mid-Layer 2 "Mid-Layer 2-No Net 4" (none, pour order 39): 165 vertices, not listed, extent 1294.781,26.789 1296.405,27.764
no net on Mid-Layer 2 "Mid-Layer 2-No Net 5" (none, pour order 40): 91 vertices, not listed, extent 1287.831,25.839 1288.805,26.813
no net on Mid-Layer 2 "Mid-Layer 2-No Net 6" (none, pour order 43): 157 vertices, not listed, extent 1280.481,28.689 1282.055,29.664
no net on Mid-Layer 2 "Mid-Layer 2-No Net 7" (none, pour order 42): 343 vertices, not listed, extent 1278.581,26.889 1280.555,28.864
no net on Mid-Layer 2 "Mid-Layer 2-No Net 8" (none, pour order 41): 157 vertices, not listed, extent 1280.481,26.089 1282.055,27.064
no net on Bottom Layer "Bottom Layer-No Net" (none, pour order 54): 97 vertices, not listed, extent 1245.829,24.845 1247.407,26.392
no net on Bottom Layer "Bottom Layer-No Net 1" (none, pour order 52): 91 vertices, not listed, extent 1247.471,26.33 1250.565,29.423
no net on Bottom Layer "Bottom Layer-No Net 2" (none, pour order 50): 91 vertices, not listed, extent 1278.631,23.14 1280.605,25.113
no net on Bottom Layer "Bottom Layer-No Net 3" (none, pour order 53): 91 vertices, not listed, extent 1247.831,29.639 1248.805,30.613
no net on Bottom Layer "Bottom Layer-No Net 4" (none, pour order 51): 91 vertices, not listed, extent 1278.631,30.79 1280.605,32.763
no net on Top Layer "Top Layer-No Net" (solid, pour order 11): 137 vertices, not listed, extent 1294.918,27.376 1298.318,29.176

## Keep-outs
Keep-Out Layer:
  lines w0.005: 1244.618,15.176 1244.618,40.576 1254.618,40.576 1254.618,33.376 1288.118,33.376 1288.118,32.476 1288.121,32.386 1288.131,32.295 1288.146,32.206 1288.168,32.118 1288.196,32.032 1288.23,31.948 1288.27,31.866 1288.316,31.788 1288.366,31.712 1288.422,31.641 1288.483,31.573 1288.548,31.51 1288.618,31.452 1288.691,31.399 1288.768,31.351 1288.848,31.308 1288.931,31.271 1289.016,31.24 1289.104,31.215 1289.192,31.196 1289.282,31.184 1289.373,31.177 1289.463,31.177 1289.554,31.184 1289.644,31.196 1289.732,31.215 1289.82,31.24 1289.905,31.271 1289.988,31.308 1290.068,31.351 1290.145,31.399 1290.218,31.452 1290.288,31.51 1290.353,31.573 1290.414,31.641 1290.47,31.712 1290.52,31.788 1290.566,31.866 1290.606,31.948 1290.64,32.032 1290.668,32.118 1290.69,32.206 1290.705,32.295 1290.715,32.386 1290.718,32.476 1290.718,33.376 1296.118,33.376 1296.118,32.476 1302.618,32.476 1302.618,23.276 1296.118,23.276 1296.118,22.376 1290.718,22.376 1290.718,23.276 1290.715,23.367 1290.705,23.457 1290.69,23.547 1290.668,23.635 1290.64,23.721 1290.606,23.805 1290.566,23.887 1290.52,23.965 1290.47,24.041 1290.414,24.112 1290.353,24.179 1290.288,24.242 1290.218,24.301 1290.145,24.354 1290.068,24.402 1289.988,24.445 1289.905,24.482 1289.82,24.513 1289.732,24.538 1289.644,24.557 1289.554,24.569 1289.463,24.576 1289.373,24.576 1289.282,24.569 1289.192,24.557 1289.104,24.538 1289.016,24.513 1288.931,24.482 1288.848,24.445 1288.768,24.402 1288.691,24.354 1288.618,24.301 1288.548,24.242 1288.483,24.179 1288.422,24.112 1288.366,24.041 1288.316,23.965 1288.27,23.887 1288.23,23.805 1288.196,23.721 1288.168,23.635 1288.146,23.547 1288.131,23.457 1288.121,23.367 1288.118,23.276 1288.118,22.376 1254.618,22.376 1254.618,15.176 1244.618,15.176

## Silkscreen, mask and mechanical layers (free items; w line width, h text height)
Mechanical 1:
  drawing of 206 lines, arcs and shapes, not listed

## Text inside footprints (layer, text, board x,y; h text height)
J1: Mechanical 8 "2.5" at 1242.2,29.013 h1.2; Mechanical 8 "3.0" at 1239.7,29.013 h1.2
J2: Top Overlay "20" at 1296.593,31.926 h1 r180; Top Overlay "11" at 1296.443,24.776 h1 r180; Drill Drawing "1+/-0.1" at 1301.461,35.608 h1.2 r180; Drill Drawing "0.3X45" at 1304.658,34.544 h1.2 r90; Bottom Overlay "1" at 1296.593,31.026 h1; Bottom Overlay "10" at 1296.443,23.876 h1